# Altium PCB esp32.PcbDoc (part 2 of 3)
Units mil, origin at the board's own origin, x right, y up, seen from the top; angles counter-clockwise.
Board outline 2755 x 1098 mil, 4 copper layers (L1, L2, L3, L4), stack 61.745 mil thick; 63 components, 73 nets, 303 pads, 170 vias.
Unrouted connection lines stored in the file: 4.
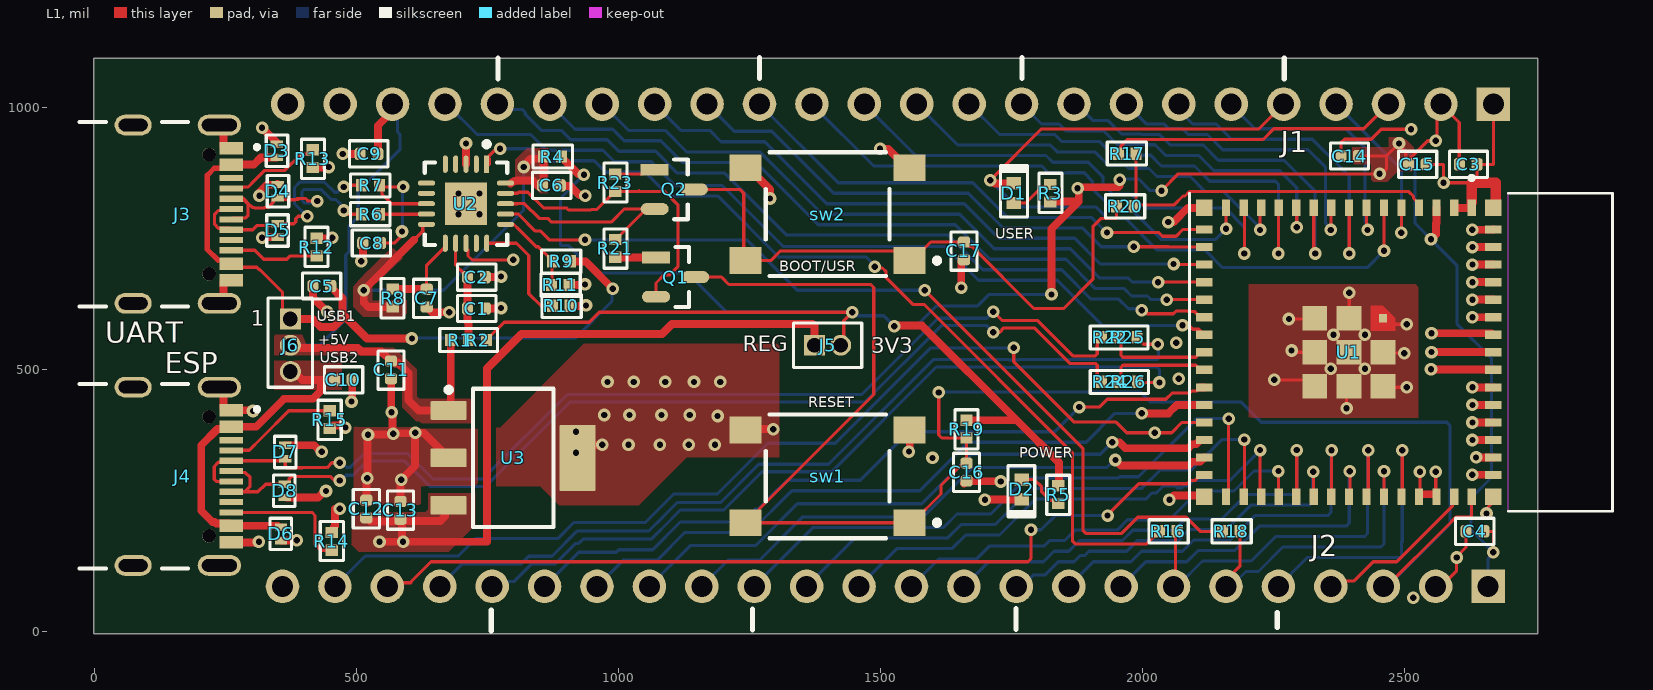
[diagram p0: L1 view]

## Via types
v1: diameter 24, hole 12, L1 to L4, tented both sides, 169 vias
v2: diameter 24/24/24 (per signal layer), hole 12, L1 to L4, tented both sides, 1 vias

## Nets (pads, with @x,y where several pads share a name; then routed paths per layer and width w, separated by ;. In a path a pad name is that pad's centre, name@x,y a point inside that pad or via, vN(x,y) a via of type N, cw(c..) or ccw(c..) an arc to the next point about the centre after c; other vN are vias at no path point) (continued)
CON1_USB_N: (continued)
  L1 w6.23: J3.A7@261.2,786.16 264,788.95 288.75,788.95 292.96,793.16 292.96,815.52 285.74,822.74 264,822.74 J3.B7@261.2,825.53 262.04,826.37 283.82,826.37 286.6,823.59 293.81,816.38 301.19,809 304.31,809 305.43,807.89 324.57,807.89 325.69,809 331.8,809 341.3,818.51 341.3,823.43 345.08,827.2 D4.2@350,827.2 352.58,824.62 366.88,824.62 367.7,823.8 383.12,823.8 383.29,823.96 388.81,823.96 386.88,825.89 391.57,825.89 391.69,826 403,826 408,821 v1(425,821) ; v1(476,803) 483,796 R6.1@509.98,796
  L4 w6: v1(425,821) 421.66,817.65 400.47,817.65 396.06,822.06 396.06,839.35 399.71,843 433.19,843 452.41,823.78 460.97,823.78 470.01,814.74 470.01,813.8 476,807.81 v1(476,803)
CON1_USB_P: D5.2 J3.A6 J3.B6 R7.1 | length 469.5
  L1 w6.23: J3.A6@263.93,803.11 J3.A6@261.2,805.84 258.41,803.05 236.67,803.05 229.45,795.84 229.45,776.48 236.67,769.26 258.41,769.26 J3.B6@261.2,766.47 302.63,766.47 cw(c320,751.22) 304,767.9 310.74,774.65 346.86,774.65 D5.2@350,777.8 ; D5.2@345.08,777.8 D5.2@350,777.8 ; v1(406,792) 388.65,792 384,787.35 384,781.44 380.35,777.8 D5.2@350,777.8 ; v1(476,848) 479,851 R7.1@509.98,851
  L4 w6: v1(406,792) 381.83,816.17 381.83,846.96 392.11,857.23 439.08,857.23 458.3,838.01 463.47,838.01 473.46,848 v1(476,848)
CON2_USB_N: D7.2 J4.A7 J4.B7 R22.1 | length 2006.5
  L1 w6.23: J4.A7@261.2,286.16 232.84,286.16 228.58,290.42 228.58,314.65 236.67,322.74 258.41,322.74 J4.B7@261.2,325.53 354.4,325.53 358.47,329.59 D7.2@364,329.59 364,316.16 367.65,312.51 396.78,312.51 396.99,312.72 444,312.72 453.28,322 v1(468.43,322) ; v1(1715,610) 1731.66,593.35 1799.25,593.35 1866.99,525.61 1909.84,525.61 1913.49,529.26 1913.49,553.52 R22.1@1920.97,561
  L4 w6: v1(468.43,322) 471.99,322 480.96,313.02 488.56,313.02 514.7,339.17 597.83,339.17 646,291 741,291 902.06,452.06 1463.94,452.06 1609.49,597.61 1702.47,597.61 1714.85,610 v1(1715,610)
CON2_USB_P: D8.2 J4.A6 J4.B6 R24.1 | length 1979
  L1 w6.23: J4.B6@261.2,266.47 286.67,266.47 ; J4.A6@261.2,305.84 264,303.05 287.95,303.05 297,294 297,276.8 286.67,266.47 ; v1(468,288) 458,288 450.63,295.37 375.35,295.37 371.7,291.72 371.7,284.77 367.92,281 D8.2@363,281 326.67,281 312.14,266.47 286.67,266.47 ; v1(1715,571) 1727,571 1735.11,579.11 1793.36,579.11 1861.1,511.38 1909.84,511.38 1913.49,507.73 1913.49,483.51 R24.1@1921,476
  L4 w6: v1(468,288) 470.65,288 480.53,297.89 493.54,297.89 520.6,324.94 591.94,324.94 640.11,276.77 746.89,276.77 907.96,437.83 1469.83,437.83 1615.39,583.39 1702.47,583.39 1714.85,571 v1(1715,571)